# Altium PCB AIR_Control1_080116.PcbDoc
Units mil, origin at the board's own origin, x right, y up, seen from the top; angles counter-clockwise.
Board outline 3346.46 x 2362.2 mil, 2 copper layers (Top Layer, Bottom Layer); 65 components, 49 nets, 295 pads, 68 vias.
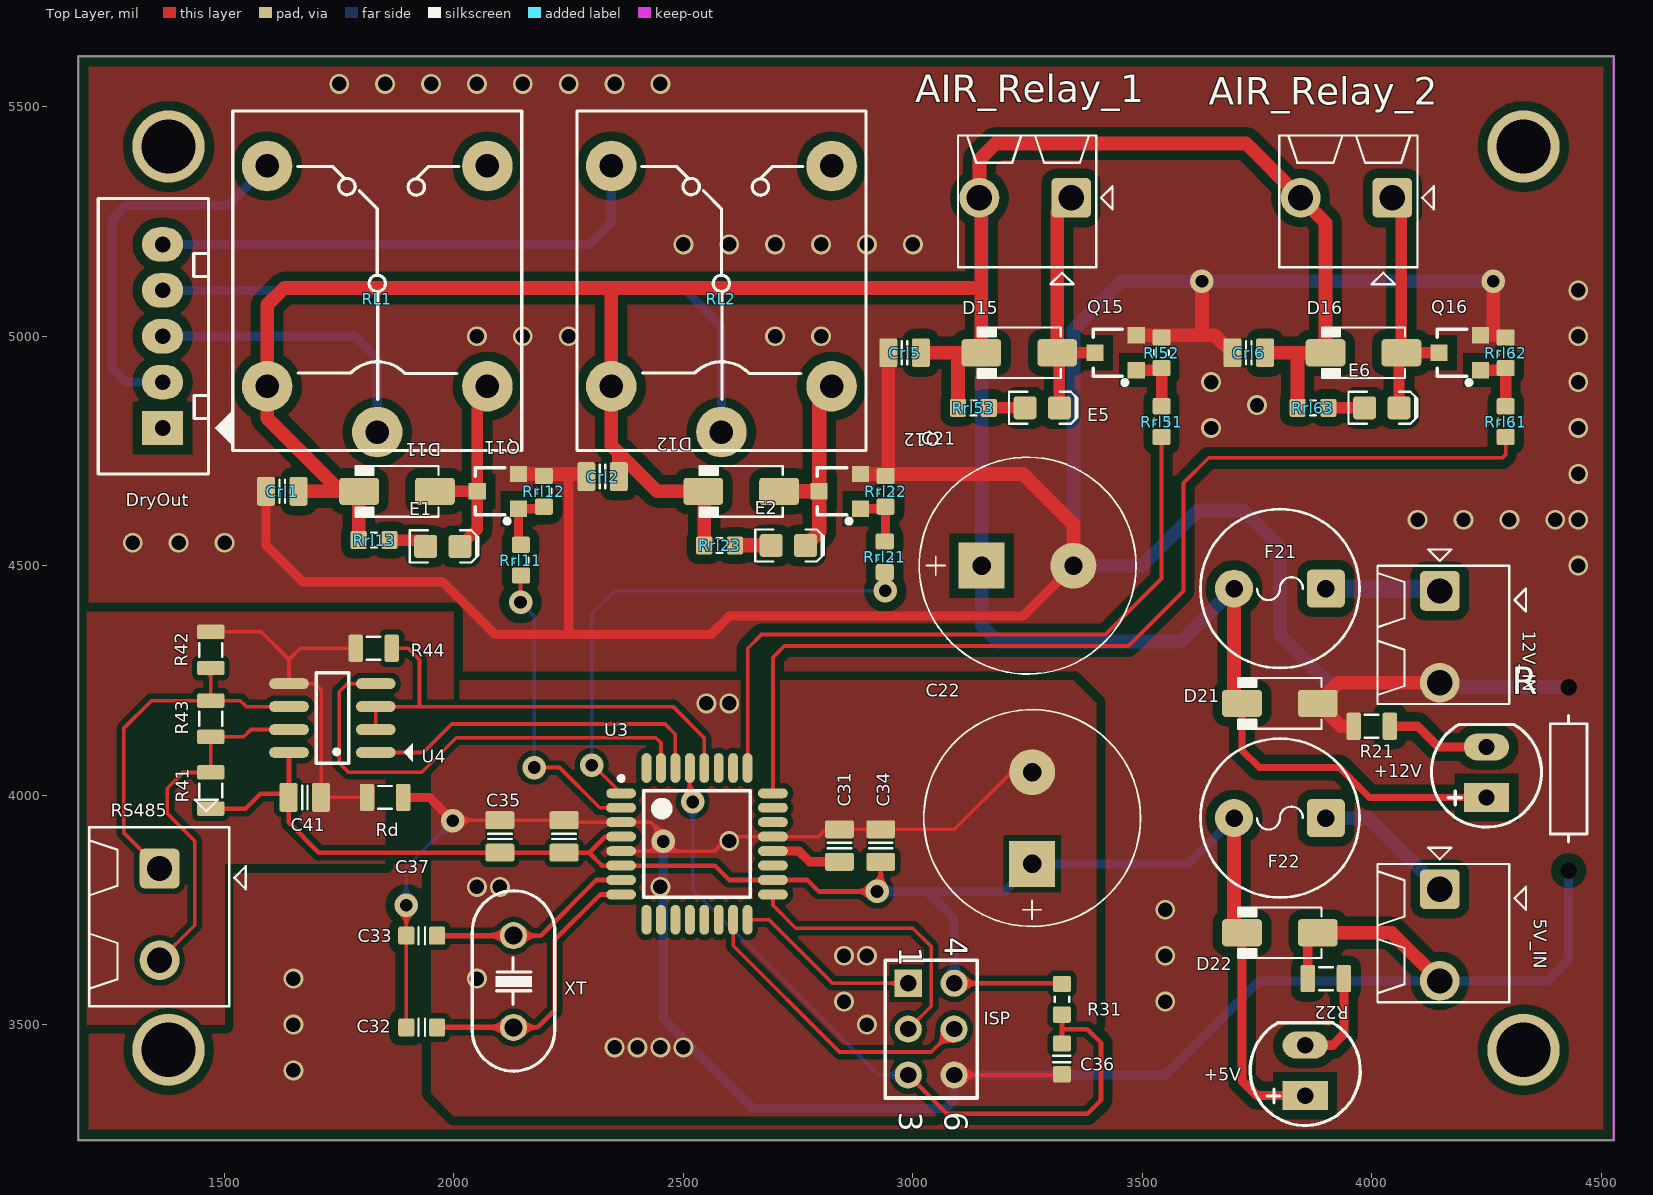
[diagram p0: Top Layer view]
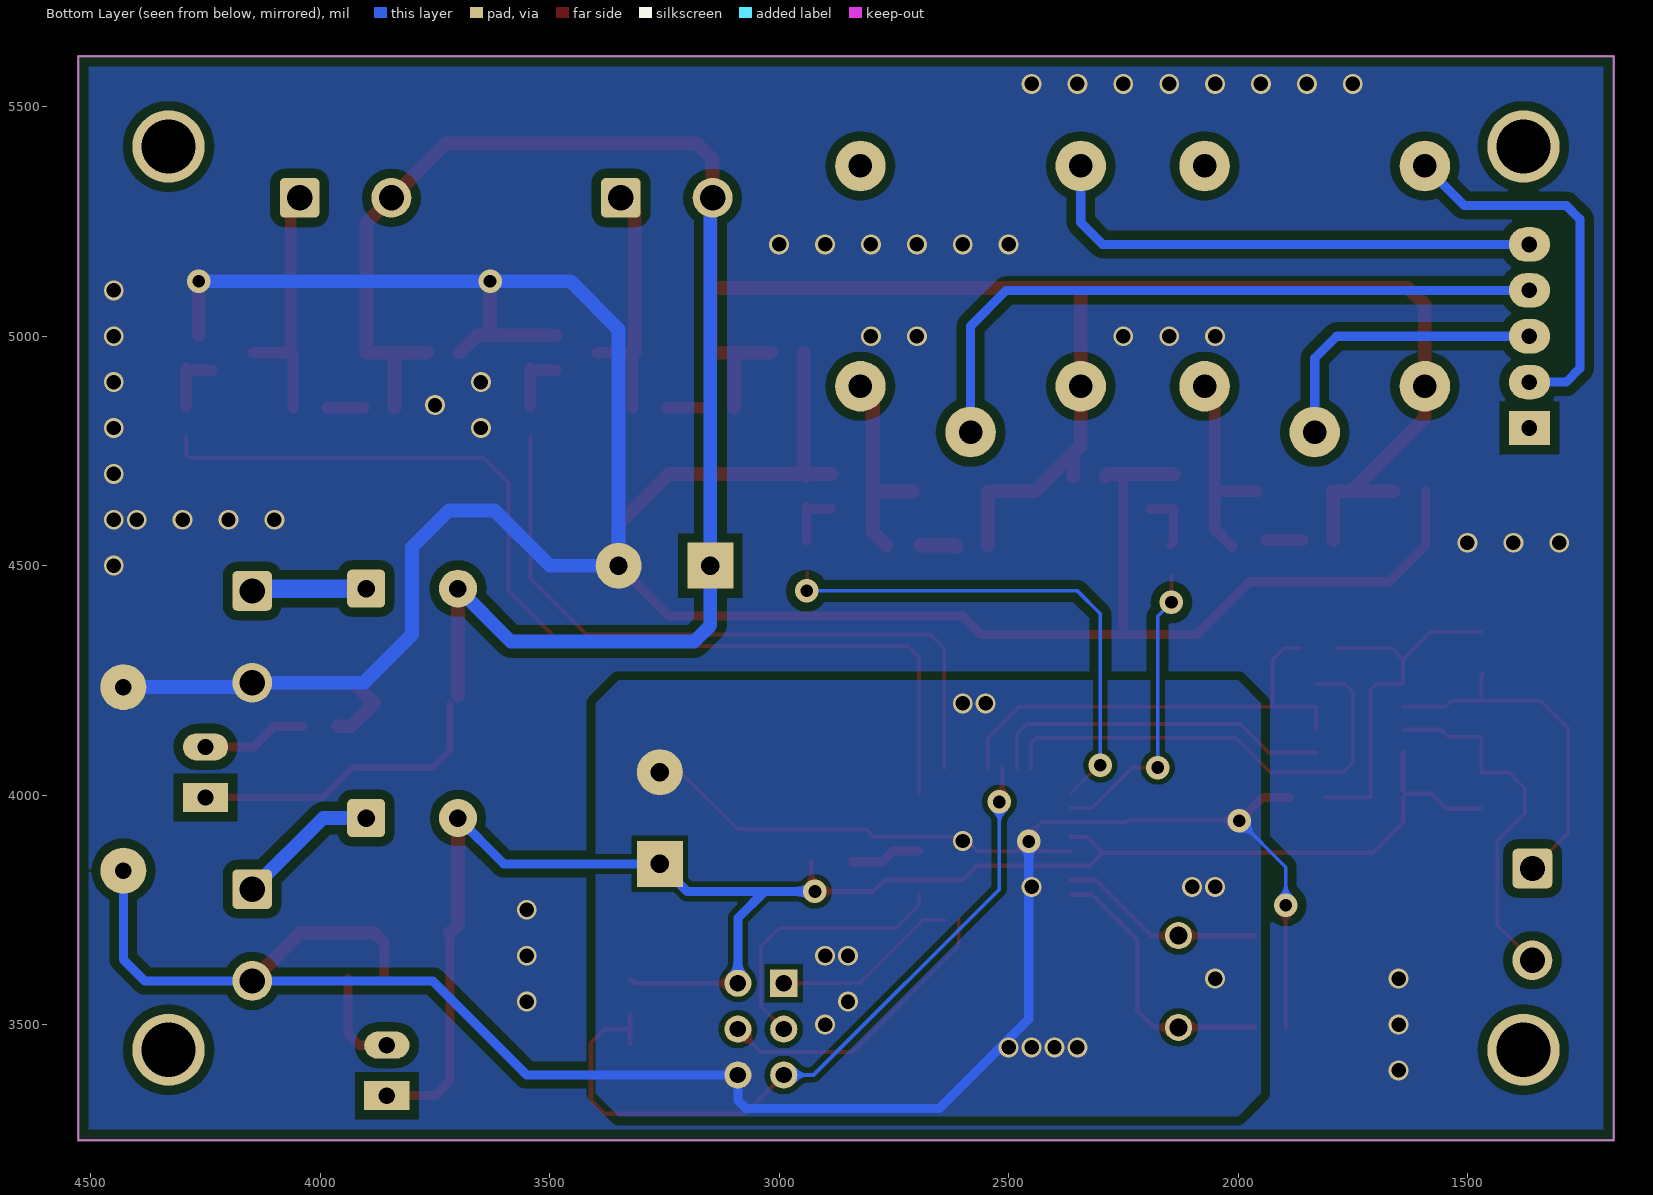
[diagram p1: Bottom Layer view, seen from below]
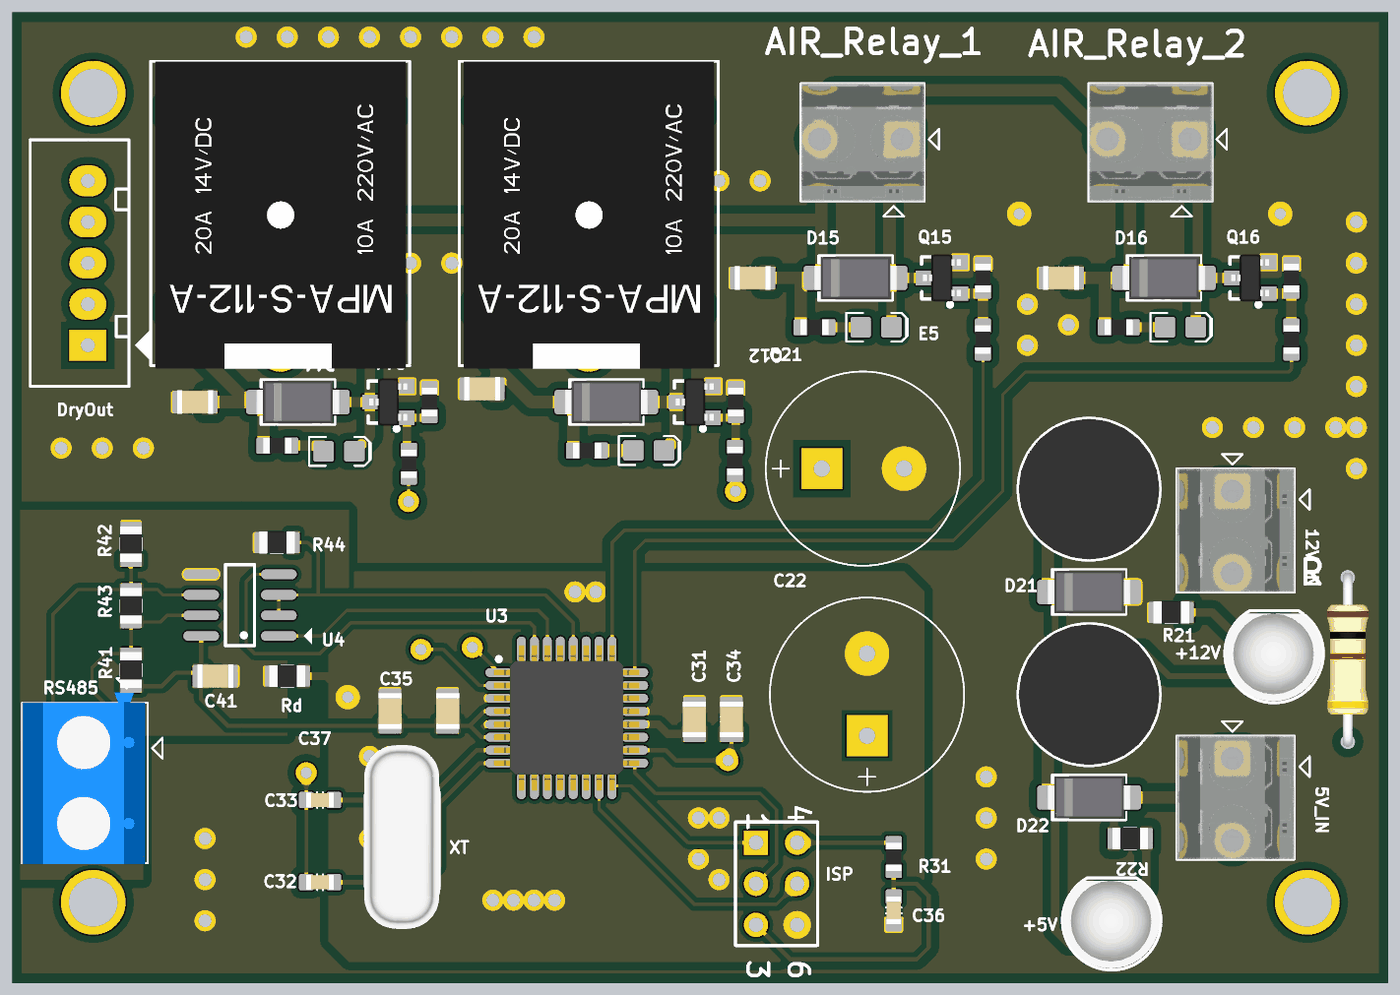
[diagram p2: 3D render of the assembled board from above, using the file's embedded part models]

## Layer stack, top to bottom
Top Solder: solder mask 0.4, Solder Resist, Dk 3.5
Top Layer: signal copper 1.4
Dielectric 1: dielectric 12.6, FR-4, Dk 4.8
Bottom Layer: signal copper 1.4
Bottom Solder: solder mask 0.4, Solder Resist, Dk 3.5

## Board outline
1181.1,3248.03 4527.56,3248.03 4527.56,5610.24 1181.1,5610.24

## Design rules (kind name [scope] priority, off if disabled: settings)
Clearance [All] p1: gap=20
PlaneConnect [All] p1: planeconnectstyle=Direct reliefexpansion=20 reliefentries=4 reliefconductorwidth=25 reliefairgap=10
PolygonConnect [All] p1: connectstyle=Direct reliefconductorwidth=25 reliefentries=4 polygonreliefangle="90 Angle" airgapwidth=10
RoutingVias [All] p1: holewidth=28 width=50 viastyle="Through Hole" minholewidth=23.62 minwidth=47.24 maxholewidth=196.85 maxwidth=196.85
SolderMaskExpansion [All] p1: expansion=4
Width [All] p1: maxlimit=118.11 minlimit=8 preferedwidth=10
29 further rules are at their usual default settings.

## Components (designator, comment, footprint, x,y, rotation, side; value= is the part's Value field where it differs from the comment)
5V_IN "Stackable ScrewTerm" 2P_PCB_ScrewTerm_200mil 4300,3850 r180 top
12V_IN "Stackable ScrewTerm" 2P_PCB_ScrewTerm_200mil 4300,4500 r180 top
+5V "Led" "LED 5mm RED" 3855,3400 r90 top
+12V "Led" "LED 5mm RED" 4250,4050 r90 top
AIR_Relay_1 "Stackable ScrewTerm" 2P_PCB_ScrewTerm_200mil 3400,5150 r90 top
AIR_Relay_2 "Stackable ScrewTerm" 2P_PCB_ScrewTerm_200mil 4100,5150 r90 top
C21 "2200uF/35V" CP_1000uF_25V 3250,4500 r0 top
C22 "2200uF/35V" CP_1000uF_25V 3260,3950 r90 top
C31 "Cap" CAPC2012N_F 2840,3890 r90 top
C32 "CAP NP" CAPC1608N 1929.72,3493.7 r180 top
C33 "CAP NP" CAPC1608N 1929.72,3693.7 r180 top
C34 "Cap" CAPC2012N_F 2930,3890 r90 top
C35 "Cap" CAPC2012N_F 2240,3910 r90 top
C36 "CAP NP" CAPC1608N 3325,3425 r90 top
C37 "Cap" CAPC2012N_F 2100,3910 r90 top
C41 "100nF/104" CAPC2012N_F 1675,3995 r180 top
Crl1 "CAP NP" CAPC2012N_F 1625.85,4662 r180 top
Crl2 "CAP NP" CAPC2012N_F 2323.8,4694 r180 top
Crl5 "CAP NP" CAPC2012N_F 2982,4964 r180 top
Crl6 "CAP NP" CAPC2012N_F 3732,4964 r180 top
D11 "Diode" DO-214AC 1875.85,4662 r180 top
D12 "Diode" DO-214AC 2625.85,4662 r180 top
D15 "Diode" DO-214AC 3232,4964 r180 top
D16 "Diode" DO-214AC 3982,4964 r180 top
D21 "Diode" DO-214AC 3800,4200 r180 top
D22 "Diode" DO-214AC 3800,3700 r180 top
DryOut "JP5" CON5 1365,4800 r90 top
E1 "Blue" LED-0805-A 1975.85,4542 r0 top
E2 "Blue" LED-0805-A 2728.8,4544 r0 top
E5 "Blue" LED-0805-A 3282,4844 r0 top
E6 "Blue" LED-0805-A 4022,4844 r0 top
F21 "1.5A" FUSE_SR-5-BK 3800,4450 r180 top
F22 "1.5A" FUSE_SR-5-BK 3800,3950 r180 top
ISP "Header 3X2A" HDR2X3_CEN 2990,3590 r270 top
Q11 "C828" "SOT23 TOP" 2095.85,4662 r90 top
Q12 "C828" "SOT23 TOP" 2840.73,4662 r90 top
Q15 "C828" "SOT23 TOP" 3442,4964 r90 top
Q16 "C828" "SOT23 TOP" 4192,4964 r90 top
R "Res" RESTH_AXIAL-0.4 4429.13,4035.43 r270 top
R21 "Res_0805_1k" RESC2012N_F 4000,4150 r180 top
R22 "Res_0805_1k" RESC2012N_F 3900,3600 r180 top
R31 "Res" RESC1608N_ZERO 3325,3555 r90 top
R41 "1k" RESC2012N_F 1470,4010 r270 top
R42 "1k" RESC2012N_F 1470,4316.38 r270 top
R43 "330R" RESC2012N_F 1470,4166.38 r270 top
R44 "330R" RESC2012N_F 1825,4320 r0 top
Rd "Res" RESC2012N_F 1850,3995 r0 top
RL1 "Relay 10A/5V" RL_5PIN 2146.85,4750 r90 top
RL2 "Relay 10A/5V" RL_5PIN 2896.85,4750 r90 top
Rl52 "Res" RESC1608N_ZERO 3542,4964 r270 top
Rrl11 "Res" RESC1608N_ZERO 2145.85,4512 r90 top
Rrl12 "Res" RESC1608N_ZERO 2195.85,4662 r270 top
Rrl13 "Res" RESC1608N_ZERO 1825.85,4555.89 r180 top
Rrl21 "Res" RESC1608N_ZERO 2938.8,4519 r90 top
Rrl22 "Res" RESC1608N_ZERO 2940.73,4662 r270 top
Rrl23 "Res" RESC1608N_ZERO 2578.8,4544 r180 top
Rrl51 "Res" RESC1608N_ZERO 3542,4814 r90 top
Rrl53 "Res" RESC1608N_ZERO 3132,4844 r180 top
Rrl61 "Res" RESC1608N_ZERO 4292,4814 r90 top
Rrl62 "Res" RESC1608N_ZERO 4292,4964 r270 top
Rrl63 "Res" RESC1608N_ZERO 3872,4844 r180 top
RS485 "Stackable ScrewTerm" 2P_PCB1 1510,3895 r180 top
U3 "ATmega88PA" 32PIN 2529.72,3893.7 r0 top
U4 "MAX485" SO-8 1735,4167.87 r180 top
XT "20MHz" XT2 2129.72,3593.7 r270 top

## Footprints (in the part's own frame and the unit in brackets; to place one, negate y for a bottom-side part, rotate by r counter-clockwise, add the part's x,y. Pads: shape width x height; smd on the part's side, far side on the other; paste and mask are expansions set on the pad)
2P_PCB1 [mm]
  rrect25% 2.2x2.2 hole 1.4: 1(3.85,1.397)
  round 2.2 hole 1.4: 2(3.85,6.477)
  silkscreen extent -0.93,-2.41 7.75,9.02, body extent 0.14,-1.54 7.74,9.06, height 10.01
2P_PCB_ScrewTerm_200mil [mm]
  rrect25% 2.2x2.2 hole 1.4: 1(3.85,1.397)
  round 2.2 hole 1.4: 2(3.85,6.477)
  silkscreen extent -0.93,-0.89 7.3,7.66, body extent 0,0 7.3,7.62, height 8.5
32PIN [mm]
  oval 1.65x0.55 smd: 1(-4.2,2.8) 2(-4.2,2) 3(-4.2,1.2) 4(-4.2,0.4) 5(-4.2,-0.4) 6(-4.2,-1.2) 7(-4.2,-2) 8(-4.2,-2.8) 17(4.2,-2.8) 18(4.2,-2) 19(4.2,-1.2) 20(4.2,-0.4) 21(4.2,0.4) 22(4.2,1.2) 23(4.2,2) 24(4.2,2.8)
  oval 0.55x1.65 smd: 9(-2.8,-4.2) 10(-2,-4.2) 11(-1.2,-4.2) 12(-0.4,-4.2) 13(0.4,-4.2) 14(1.2,-4.2) 15(2,-4.2) 16(2.8,-4.2) 25(2.8,4.2) 26(2,4.2) 27(1.2,4.2) 28(0.4,4.2) 29(-0.4,4.2) 30(-1.2,4.2) 31(-2,4.2) 32(-2.8,4.2)
  silkscreen extent -4.32,-2.95 2.95,3.75, body extent -4.5,-4.5 4.5,4.5, height 1.6
CAPC1608N [mm] "Chip Capacitor, Body 1.6x0.8mm, 0603, IPC Medium Density"
  round 0.254 on Mech14: 0(0,0)
  rrect25% 0.9x1 smd: 1(-0.85,0) 2(0.85,0)
  Top Layer pour cut-out: -0.4,0.6 0.4,0.6 0.4,-0.6 -0.4,-0.6
  silkscreen extent -0.18,-0.48 0.18,0.48, body extent -0.85,-0.45 0.85,0.45, height 0.89
CAPC2012N_F [mm] "Chip Capacitor, Body 2.0x1.2mm, 0805, IPC Medium Density, for Flex circuits"
  round 0.254 on Mech14: 0(0,0)
  rrect25% 1.2x1.4 on Top Solder: 1(-0.9,0) 1(0.9,0)
  rrect25% 1x1.6 smd paste-1: 1(-0.9,0) 2(0.9,0)
  rrect25% 1x1.4 on Top Paste: 1(-0.9,0) 1(0.9,0)
  Top Layer pour cut-out: -0.4,0.8 0.4,0.8 0.4,-0.8 -0.4,-0.8
  silkscreen extent -0.15,-0.65 0.15,0.65, body extent -1.1,-0.72 1.1,0.73, height 1.34
CON5 [mil] "CON5"
  rect 75x90 hole 34: 1(0,0)
  oval 75x90 hole 34: 2(100,0) 3(200,0) 4(300,0) 5(400,0)
  silkscreen extent -100,-150 500,140
CP_1000uF_25V [mil]
  rect 100x100 hole 40: 1(-100,0)
  round 100 hole 40: 2(100,0)
  silkscreen extent -236,-236 236,236, body extent -236,-236 237,236, height 791
DO-214AC [mm] "JEDEC DO214 variation AC. SMA"
  round 0.508 on Mech14: 0(0,0)
  rrect25% 2.2x1.5 smd: A(-2.1,0) K(2.1,0)
  silkscreen extent -2.3,-1.4 2.3,1.4, body extent -2.6,-1.3 2.6,1.3, height 2.42
FUSE_SR-5-BK [mm]
  round 0.5 on Mech14: 0(0,0)
  rrect25% 2.1x2.1 hole 0.965: 1(-2.54,0)
  round 2.1 hole 0.965: 2(2.54,0)
  silkscreen extent -4.4,-4.4 4.4,4.4, body extent -4.35,-4.32 4.35,4.32, height 8.29
HDR2X3_CEN [mm] "Connector; Header; 3x2 Position"
  rect 1.5x1.5 hole 0.9: 1(0,0)
  round 1.5 hole 0.9: 2(2.54,0) 3(5.08,0) 4(0,2.54) 5(2.54,2.54) 6(5.08,2.54)
  silkscreen extent -1.27,-1.27 6.35,3.81
"LED 5mm RED" [mm]
  rect 1.6x2.5 hole 0.9: A(-1.397,0)
  oval 1.5x2.5 hole 0.9: K(1.397,0)
  silkscreen extent -3.04,-3.05 2.64,3.04, body extent -2.94,-2.97 2.48,3.05, height 12.31
LED-0805-A [mil]
  round 20 on Mech14: 0(0,0)
  rrect25% 50x50 smd: A(-37.5,0) K(37.5,0)
  Top Layer pour cut-out: -15,30 15,30 15,-30 -15,-30
  silkscreen extent -72,-35 77,35, body extent -39,-25 39,25, height 31
RESC1608N_ZERO [mm] "Chip Resistor, Body 1.6x0.8mm, 0603, IPC Medium Density"
  round 0.254 on Mech14: 0(0,0)
  rrect25% 0.9x1 smd: 1(-0.85,0) 2(0.85,0)
  Top Layer pour cut-out: -0.4,0.6 0.4,0.6 0.4,-0.6 -0.4,-0.6
  silkscreen extent -0.15,-0.41 0.15,0.41, body extent -0.87,-0.47 0.88,0.48, height 0.54
RESC2012N_F [mm] "Chip Resistor, Body 2.0x1.2mm, 0805, IPC Medium Density"
  round 0.254 on Mech14: 0(0,0)
  rrect25% 1x1.3 on Top Solder: 1(-1,0) 1(1,0)
  rrect25% 0.8x1.5 smd paste-1: 1(-1,0) 2(1,0)
  rrect25% 0.8x1.3 on Top Paste: 1(-1,0) 1(1,0)
  Top Layer pour cut-out: -0.6,0.75 0.6,0.75 0.6,-0.75 -0.6,-0.75
  silkscreen extent -0.38,-0.64 0.38,0.64, body extent -1.1,-0.67 1.1,0.68, height 0.69
RESTH_AXIAL-0.4 [mil]
  round 0 / inner round 0 / far side round 100 hole 36 unplated: 1(-200,0) 2(200,0)
  silkscreen extent -138,-40 138,40, body extent -212,-50 212,50, height 102
RL_5PIN [mm]
  round 2.8 hole 1.3: 1(1.041,7.976) 2(15.773,14.072) 3(15.773,1.88) 4(3.581,1.88) 5(3.581,14.072)
  silkscreen extent 0.03,-0.03 18.82,15.98, body extent -0.18,0.2 18.82,15.7, height 15.5
SO-8 [mm] "8-Pin Small Outline Integrated Circuit 1.27 mm Pitch, IPC Medium Density"
  oval 2.2x0.6 smd: 1(-2.4,1.905) 2(-2.4,0.635) 3(-2.4,-0.635) 4(-2.4,-1.905) 5(2.4,-1.905) 6(2.4,-0.635) 7(2.4,0.635) 8(2.4,1.905)
  silkscreen extent -4.44,-2.5 0.9,2.5, body extent -1.95,-2.45 1.95,2.45, height 1.75
"SOT23 TOP" [mm]
  rect 0.9x0.95 smd: 1(-0.965,-1.143) 2(0,1.143) 3(0.965,-1.143)
  silkscreen extent -1.77,-0.63 1.3,1.25, body extent -1.46,-1.17 1.46,1.17, height 1
XT2 [mm]
  round 1.5 hole 1: 1(-2.54,0) 2(2.54,0)
  silkscreen extent -5.03,-2.29 4.96,2.29, body extent -5.93,-2.36 5.42,2.29, height 3.5

## Part data
5V_IN 12V_IN AIR_Relay_1 AIR_Relay_2 RS485: library part 2P_ScrewTerm_90S_3.81MM, "Terminal Block Screw Type THT 2-Position 3.81mm pitch"
C21 C22: library part CP4, "Cap 1000uF/16V - 220uF/50V"
C41: library part "CAP NP"
DryOut: library part Con5, "Connector 5"
E1 E2 E5 E6: library part LED_SMD_Blue_0805_100mcd, "LED 0805 SMD Blue 100mcd 470nm"
F21 F22: library part Fuse
ISP: "Header, 3-Pin, Dual row"
Q11 Q12 Q15 Q16: library part NPN, "Transistor C828 C1815...."
R21 R22: library part Res
R41 R42 R43 R44: library part Res, "Tro dan"
RL1 RL2: library part "Relay 1", "Relay SPDT,10A - 12VDC 5 Pin"
U3: library part ATmega48/168/328, "ATmega48/168/328"
U4: "RS232 - RS485 (Same sn75176)"
XT: library part Crystal

## Free pads (board coordinates)
  round 157.48 hole 118.11: 7(1377.95,5413.39) 8(1377.95,3444.88) 9(4330.71,3444.88) 10(4330.71,5413.39)

## Via types
v1: diameter 43.31, hole 31.5, Top Layer to Bottom Layer, 57 vias
v2: diameter 51.18, hole 27.56, Top Layer to Bottom Layer, 11 vias

## Nets (pads, with @x,y where several pads share a name; then routed paths per layer and width w, separated by ;. In a path a pad name is that pad's centre, name@x,y a point inside that pad or via, vN(x,y) a via of type N, cw(c..) or ccw(c..) an arc to the next point about the centre after c; other vN are vias at no path point)
+12V: +12V.A AIR_Relay_1.2 AIR_Relay_2.2 C21.1 Crl1.1@1661.28,4662 Crl2.1@2359.23,4694 Crl5.1@3017.43,4964 Crl6.1@3767.43,4964 D11.K D12.K D15.K D16.K D21.K F21.2 RL1.5 RL2.5 Rrl13.2 Rrl23.2 Rrl53.2 Rrl63.2 | length 7527.5
  Top Layer w15: D21.K 3717.32,4097.68 3755,4060 3930,4060 3995,3995 +12V.A
  Top Layer w30: Crl1.1@1661.28,4662 D11.K@1753,4662 ; Rrl13.2 1792.38,4661.21 D11.K D11.K@1753,4662 ; 2342.85,5102.15 RL2.5 2342.85,4762.15 2360,4745 ; Crl2.1@2359.23,4694 2359.23,4744.23 2360,4745 ; D12.K 2443,4662 2360,4745 ; Rrl23.2 D12.K@2545.33,4659.83 ; Crl5.1@3017.43,4964 3090,4964 ; Rrl53.2 3098.54,4955.46 3090,4964 ; 3144.32,5105 1630,5105 1592.85,5067.85 RL1.5 1592.85,4822.15 D11.K@1753,4662 ; D21.K@3700,4217.32 F21.2 ; Crl6.1@3767.43,4964 D16.K 3899.32,5247.25 AIR_Relay_2.2 3726.57,5420 3180,5420 3145,5385 AIR_Relay_1.2 3149.32,5297.25 D15.K 3090,4964 ; Rrl63.2 3838.54,4955.46
  Bottom Layer w30: AIR_Relay_1.2 3150,5296.57 C21.1 3150,4370 3185,4335 3585,4335 F21.2
ADC0: U3.23
ADC3: U3.26
ADC4: U3.27
ADC6: U3.19
ADC7: U3.22
AIR1: Rrl51.1 U3.25 | length 1534.5
  Top Layer w8: U3.25 2639.96,4319.96 2670,4350 3420,4350 3542,4472 Rrl51.1
AIR2: Rrl61.1 U3.24 | length 2252.3
  Top Layer w8: U3.24 2695.08,4300.08 2720,4325 3470,4325 3590,4445 3590,4680 3645,4735 4285,4735 4292,4742 Rrl61.1
AREF: C31.1@2840,3854.57 U3.20 | length 154.6
  Top Layer w20: U3.20 2752.05,3877.95 2775.43,3854.57 C31.1@2840,3854.57
COM1: DryOut.3 RL1.1 | length 648.8
  Bottom Layer w20: DryOut.3 1785,5000 1832.85,4952.15 RL1.1
COM2: DryOut.4 RL2.1 | length 1481.2
  Bottom Layer w20: DryOut.4 2505,5100 2582.85,5022.15 RL2.1
DGND: C41.1@1710.43,3995 R42.1@1470,4355.75 R44.1@1785.63,4320 Rd.1@1810.63,3995 U4.5 | length 813.6
  Top Layer w8: R42.1@1470,4355.75 1580.28,4355.75 1640.51,4295.51 ; R44.1@1785.63,4320 1665,4320 1640.51,4295.51 ; Rd.1@1810.63,3995 1710.43,3995 1710.43,4229.57 1697.13,4242.87 U4.5 1640.51,4295.51
FAN3: U3.32
GND: 5V_IN.2 C22.2 C31.2 C32.2 C33.2 C34.2 C35.2 C36.1 C37.2 D22.A ISP.6 R22.2 R.2 Rd.2 U3.3 U3.5 U3.21 | length 5456.4
  Top Layer w8: v2(1896,3760) 1896.26,3759.74 C33.2 C32.2 ; v2(1997,3944) 1998.43,3945.43 C37.2 C35.2 2244.49,3940.95 U3.3 2429.05,3940.95 v2@2450,3920 ; U3.5 v2@2450,3877.95 ; v2@2456,3877.95 2567.95,3877.95 2599.45,3909.45 U3.21 2794.45,3909.45 2810.43,3925.43 C31.2 C34.2 3090.43,3925.43 C22.2@3215,4050 ; ISP.6 3323.46,3390 C36.1
  Top Layer w20: Rd.2 1946,3995 v2(1997,3944) ; R22.2 D22.A@3860.63,3677.95
  Top Layer w25: D22.A@3860.63,3677.95 D22.A
  Top Layer w30: D22.A 4043.43,3700 5V_IN.2
  Bottom Layer w8: v2(1896,3760) 1896,3843 v2(1997,3944)
  Bottom Layer w20: v2(2456,3899) 2456,3512 2651,3317 3072,3317 3090,3335 ISP.6 3550,3390 3755,3595 5V_IN.2 4382.4,3595 4429.13,3641.73 R.2
  other v1: 2350,3450 2400,3450 2450,3450 2500,3450 2900,3500 2850,3550 2050,3600 2850,3650 2900,3650 2050,3800 2100,3800 2450,3800 2600,3900 2550,4200 2600,4200
MCU_RX: U3.30 U4.1 | length 761.5
  Top Layer w8: U4.1 1932.87,4092.87 1995,4155 2460,4155 2482.48,4132.52 U3.30
MCU_TX: U3.31 U4.4 | length 1041.7
  Top Layer w8: U4.4 1767.87,4242.87 1750,4225 1750,4070 1770,4050 1930,4050 2005,4125 2440,4125 2450.98,4114.02 U3.31
MISO: ISP.1 U3.16 | length 407.3
  Top Layer w8: U3.16 2686.65,3728.35 2825,3590 ISP.1
MOSI: ISP.5 U3.15 | length 655
  Top Layer w8: U3.15 2608.46,3671.54 2840,3440 3040,3440 ISP.5
Net5V_IN_1: 5V_IN.1 F22.1 | length 312.6
  Bottom Layer w30: F22.1 3993.43,3950 5V_IN.1
Net12V_IN_1: 12V_IN.1 F21.1 | length 250.5
  Bottom Layer w40: F21.1 4143.43,4450 12V_IN.1
Net+5V_2: +5V.K R22.1@3939.37,3600 | length 215.1
  Top Layer w20: +5V.K 3915,3455 3939.37,3479.37 R22.1@3939.37,3600
Net+12V_2: +12V.K R21.1@4039.37,4150 | length 229.3
  Top Layer w20: R21.1@4039.37,4150 4100,4150 4145,4105 +12V.K
NetAIR_Relay_1_1: AIR_Relay_1.1 D15.A E5.K Q15.2 | length 509.6
  Top Layer w25: D15.A D15.A@3319.5,4964 ; E5.K D15.A@3319.5,4964 ; Q15.2 D15.A@3319.5,4964
  Top Layer w30: D15.A AIR_Relay_1.1@3314.68,5271.25
NetAIR_Relay_2_1: AIR_Relay_2.1 D16.A E6.K Q16.2 | length 550.2
  Top Layer w25: AIR_Relay_2.1 4064.68,5281.9 D16.A ; E6.K 4059.5,4958.82 D16.A ; Q16.2 D16.A
NetD11_1: D11.A E1.K Q11.2 RL1.4 | length 461.4
  Top Layer w25: D11.A Q11.2 ; E1.K 2050.85,4579.5 Q11.2 ; RL1.4@2050.85,4895.5 Q11.2
NetD12_1: D12.A E2.K Q12.2 RL2.4 | length 445.8
  Top Layer w31.5: D12.A Q12.2 ; E2.K 2795.73,4573.43 Q12.2 ; RL2.4@2795.73,4890.38 Q12.2
NetE1_A: E1.A Rrl13.1 | length 79
  Top Layer w25: Rrl13.1 E1.A@1938.35,4555.89
NetE2_A: E2.A Rrl23.1 | length 77.3
  Top Layer w31.5: Rrl23.1@2615.22,4541 2618.22,4544 E2.A
NetE5_A: E5.A Rrl53.1 | length 79
  Top Layer w25: Rrl53.1 E5.A
NetE6_A: E6.A Rrl63.1 | length 79
  Top Layer w25: Rrl63.1 E6.A
NetQ11_1: Q11.1 Rrl11.2 Rrl12.2 | length 131.1
  Top Layer w19.68: Rrl11.2 2140.85,4550.46 Q11.1 Rrl12.2@2191.31,4624
NetQ12_1: Q12.1 Rrl21.2 Rrl22.2 | length 124.6
  Top Layer w19.68: Q12.1 Rrl22.2@2936.19,4624 ; Rrl21.2@2940.73,4554.39 Rrl22.2
NetQ15_1: Q15.1 Rl52.2 Rrl51.2 | length 139.9
  Top Layer w25: Q15.1 3537.46,4926 Rl52.2 Rrl51.2
NetQ16_1: Q16.1 Rrl61.2 Rrl62.2 | length 139.9
  Top Layer w25: Q16.1 4287.46,4926 Rrl62.2 Rrl61.2
NO1: DryOut.2 RL1.2 | length 833.3
  Bottom Layer w20: DryOut.2 1285,4900 1255,4930 1255,5255 1285,5285 1506.85,5285 RL1.2
NO2: DryOut.5 RL2.2 | length 1120.8
  Bottom Layer w20: DryOut.5 2295,5200 2342.85,5247.85 RL2.2
PC5: R44.2 U3.28 U4.2 U4.3 | length 1032.9
  Top Layer w8: U4.2 U4.3 1925,4192.87 ; R44.2 1900,4320 1925,4295 1925,4192.87 ; U3.28 2545.47,4124.53 2477.13,4192.87 1925,4192.87
PGND: 12V_IN.2 C21.2 Crl1.2 Crl2.2 Crl5.2 Crl6.2 D21.A Q11.3 Q12.3 Q15.3 Q16.3 R21.2 R.1 Rl52.1 Rrl12.1 Rrl22.1 Rrl62.1 | length 7102.8
  Top Layer w20: Crl1.2 1590.41,4544.59 1670,4465 1975,4465 2090,4350 2560,4350 2600,4390 3240,4390 C21.2 ; 2250,4355 2250,4700
  Top Layer w30: Q11.3 2250,4700 2282.37,4700 Crl2.2 ; Q12.3 Rrl22.1@2945.26,4700 ; Rrl22.1 Rrl22.1@2945.26,4700 ; Crl5.2 2946.57,4701.3 Rrl22.1@2945.26,4700 ; C21.2 3350,4590 3240,4700 Rrl22.1@2945.26,4700 ; Q15.3 3630,5002 ; v2(3630,5120) 3630,5002 ; Crl6.2 3658.57,5002 3630,5002 ; R21.2 3932.68,4150 D21.A 3927.68,4245 12V_IN.2 ; 4265,5002 v2(4265,5120)
  Bottom Layer w30: v2(4265,5120) v2(3630,5120) 3455,5120 3350,5015 C21.2 3500,4500 3620,4620 3720,4620 3800,4540 3800,4350 3905,4245 12V_IN.2 4157.99,4235.43 R.1
  other v1: 1650,3400 1650,3500 3550,3550 1650,3600 3550,3650 3550,3750 4450,4500 1300,4550 1400,4550 1500,4550 4100,4600 4200,4600 4300,4600 4400,4600 4450,4600 4450,4700 3650,4800 4450,4800 3750,4850 3650,4900 4450,4900 2050,5000 2150,5000 2250,5000 2700,5000 2800,5000 4450,5000 4450,5100 2500,5200 2600,5200 2700,5200 2800,5200 2900,5200 3000,5200 1750,5550 1850,5550 1950,5550 2050,5550 2150,5550 2250,5550 2350,5550 2450,5550
RELAY_1: Rrl11.1 U3.2 | length 657
  Top Layer w8: v2(2145,4420) 2145,4477.69 Rrl11.1 ; v2(2175,4060) 2230,4060 2317.56,3972.44 U3.2
  Bottom Layer w8: v2(2145,4420) 2175,4390 v2(2175,4060)
RELAY_2: Rrl21.1 U3.1 | length 1121.4
  Top Layer w8: v2(2300,4065) 2303.31,4065 U3.1 ; Rrl21.1 2938.8,4446.2 v2(2940,4445)
  Bottom Layer w8: v2(2300,4065) 2300,4395 2350,4445 v2(2940,4445)
RELAY_3: U3.10
RELAY_4: U3.9
RS485A: R42.2 R43.1@1470,4205.75 RS485.1 U4.6 | length 786.8
  Top Layer w8: RS485.1 1280,3918.44 1280,4145 1340.75,4205.75 R43.1@1470,4205.75 ; 1470,4260 R43.1@1470,4205.75 ; U4.6 1547.13,4192.87 1534.25,4205.75 R43.1@1470,4205.75
  Top Layer w10: R42.2@1467.12,4262.88 1470,4260
RS485B: R41.1@1470,4049.37 R43.2 RS485.2 U4.7 | length 795.5
  Top Layer w8: RS485.2 1435,3716.57 1435,3900 1375,3960 1375,4015 1409.37,4049.37 1470,4049.37 R43.2 1542.01,4127.01 1557.87,4142.87 U4.7
RST: C36.2 ISP.3 R31.1 U3.29 | length 1656.6
  Top Layer w8: U3.29 2513.98,3991.02 v2(2520,3985)
  Top Layer w10: ISP.3 3074,3306 3381,3306 3410,3335 3410,3460 3380,3490 3325,3490 ; C36.2 3325,3490 ; R31.1 3325,3490
  Bottom Layer w8: v2(2520,3985) 2520,3795 2925,3390 ISP.3
SCK: ISP.2 U3.17 | length 606.4
  Top Layer w8: U3.17 2695.08,3759.92 2745,3710 3000,3710 3040,3670 3040,3540 ISP.2
VCC: +5V.A C22.1 C34.1@2930,3854.57 C35.1@2240,3874.57 C37.1@2100,3874.57 C41.2 D22.K F22.2 ISP.4 R31.2 R41.2 U3.4 U3.6 U3.18 U4.8 | length 3826.5
  Top Layer w10: R41.2 1545.63,3970.63 1578.31,4003.31 C41.2@1635,4003.31 ; C41.2 1639.57,3940.43 1705.43,3874.57 2240,3874.57 2294.57,3874.57 ; C41.2@1640.51,4008.82 U4.8 ; U3.4 2329.45,3909.45 2294.57,3874.57 ; v2@2915,3790 2795,3790 2770.04,3814.96 U3.18 2600.04,3814.96 2568.54,3846.46 U3.6 2322.68,3846.46 2294.57,3874.57 ; v2@2930,3805 C34.1@2930,3854.57 ; ISP.4 3315.79,3590 R31.2@3325,3599.21
  Top Layer w20: D22.K 3717.32,3377.68 3750,3345 +5V.A
  Top Layer w30: F22.2 3700,3717.32 D22.K
  Bottom Layer w20: v2(2922,3790) 3032,3790 ; ISP.4 3090,3732 3032,3790 ; F22.2 3600,3850 C22.1 3200,3790 3032,3790
XTAL1: C33.1 U3.7 XT.1 | length 451.4
  Top Layer w10: XT.1 2188.7,3693.7 2309.96,3814.96 U3.7
  Top Layer w12: C33.1 XT.1
XTAL2: C32.1 U3.8 XT.2 | length 611.2
  Top Layer w10: XT.2 2182.4,3493.7 2220,3531.3 2220,3685 2318.46,3783.46 U3.8
  Top Layer w12: C32.1 XT.2
pads on no net: C31.0 C31.1@2840,3854.57 C31.1@2840,3925.43 C31.1@2840.01,3854.56 C31.1@2840.01,3925.43 C32.0 C33.0 C34.0 C34.1@2930,3854.57 C34.1@2930,3925.43 C34.1@2930.01,3854.56 C34.1@2930.01,3925.43 C35.0 C35.1@2240,3874.57 C35.1@2240,3945.43 C35.1@2240.01,3874.56 C35.1@2240.01,3945.43 C36.0 C37.0 C37.1@2100,3874.57 C37.1@2100,3945.43 C37.1@2100.01,3874.56 C37.1@2100.01,3945.43 C41.0 C41.1@1639.57,3995 C41.1@1639.57,3995.01 C41.1@1710.43,3995 C41.1@1710.44,3995.01 Crl1.0 Crl1.1@1590.41,4662 Crl1.1@1590.42,4662.01 Crl1.1@1661.28,4662 Crl1.1@1661.28,4662.01 Crl2.0 Crl2.1@2288.37,4694 Crl2.1@2288.37,4694.01 Crl2.1@2359.23,4694 Crl2.1@2359.23,4694.01 Crl5.0 Crl5.1@2946.57,4964 Crl5.1@2946.57,4964.01 Crl5.1@3017.43,4964 Crl5.1@3017.44,4964.01 Crl6.0 Crl6.1@3696.57,4964 Crl6.1@3696.57,4964.01 Crl6.1@3767.43,4964 Crl6.1@3767.44,4964.01 D11.0 D12.0 D15.0 D16.0 D21.0 D22.0 DryOut.1 E1.0 E2.0 E5.0 E6.0 F21.0 F22.0 R21.0 R21.1@3960.63,4150 R21.1@3960.63,4150.01 R21.1@4039.37,4150 R21.1@4039.37,4150.01 R22.0 R22.1@3860.63,3600 R22.1@3860.63,3600.01 R22.1@3939.37,3600 R22.1@3939.37,3600.01 R31.0 R41.0 R41.1@1469.99,3970.63 R41.1@1469.99,4049.37 R41.1@1470,3970.63 R41.1@1470,4049.37 R42.0 R42.1@1469.99,4277.01 R42.1@1469.99,4355.75 R42.1@1470,4277.01 R42.1@1470,4355.75 R43.0 R43.1@1469.99,4127.01 R43.1@1469.99,4205.75 R43.1@1470,4127.01 R43.1@1470,4205.75 R44.0 R44.1@1785.63,4319.99 R44.1@1785.63,4320 R44.1@1864.37,4319.99 R44.1@1864.37,4320 Rd.0 Rd.1@1810.63,3994.99 Rd.1@1810.63,3995 Rd.1@1889.37,3994.99 Rd.1@1889.37,3995 RL1.3 RL2.3 Rl52.0 Rrl11.0 Rrl12.0 Rrl13.0 Rrl21.0 Rrl22.0 Rrl23.0 Rrl51.0 Rrl53.0 Rrl61.0 Rrl62.0 Rrl63.0 U3.11 U3.12 U3.13 U3.14

## Polygon pours and split planes (outlines as drawn)
PGND on Top Layer "PGND_L01_P008" (solid, remove dead copper, pour order 8): 1181.1,5610.24 4527.56,5610.24 4527.56,3248.03 1181.1,3248.03
DGND on Top Layer "DGND_L01_P002" (solid, remove dead copper, pour order 2): 1200,4400 2000,4400 2000,4050 1850,4050 1850,3850 1500,3850 1500,3500 1200,3500
GND on Top Layer "GND_L01_P004" (solid, remove dead copper, pour order 4): 2000,4250 3350,4250 3400,4200 3400,3700 3400,3350 3350,3300 2000,3300 1950,3350 1950,4200
PGND on Bottom Layer "PGND_L02_P010" (solid, remove dead copper, pour order 10): 1181.1,3248.03 4527.56,3248.03 4527.56,5610.24 1181.1,5610.24
GND on Bottom Layer "GND_L02_P006" (solid, remove dead copper, pour order 6): 3400,3350 3400,4200 3350,4250 2000,4250 1950,4200 1950,3350 2000,3300 2700,3300 3350,3300

## Keep-outs
Keep-Out Layer:
  the board outline again, w5.91

## Text inside footprints (layer, text, board x,y; h text height)
ISP: Top Overlay "6" at 3070,3310 h50 r270; Top Overlay "3" at 2970,3310 h50 r270; Top Overlay "1" at 2970,3670 h50 r270; Top Overlay "4" at 3070,3690 h50 r270